# Allegro board GALVO_IF.brd
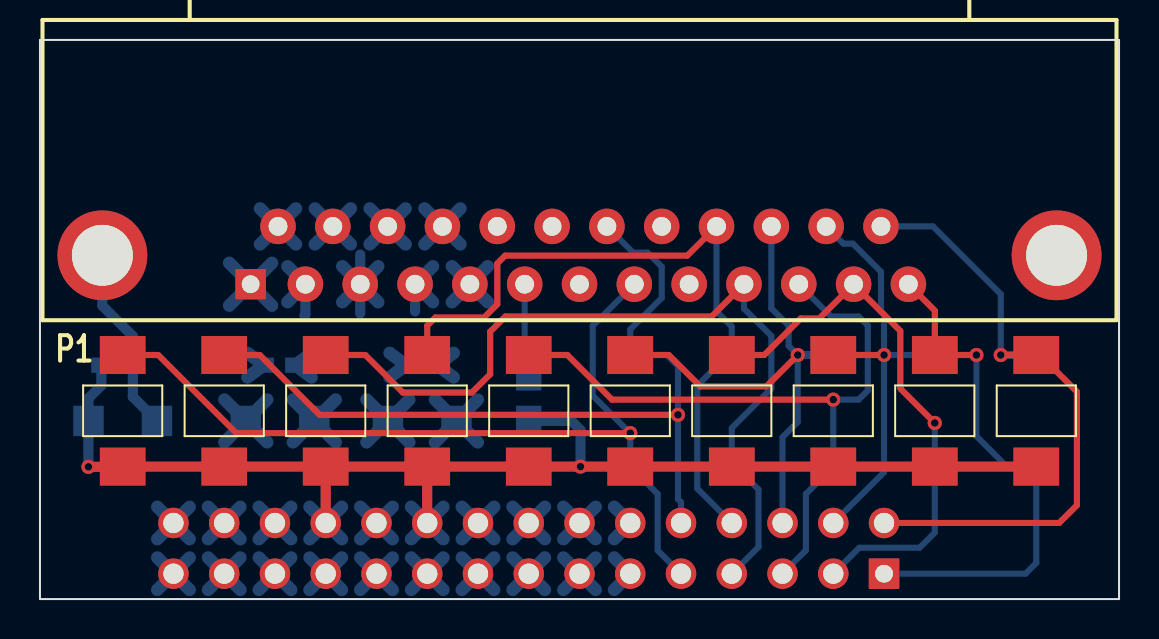
[diagram p0: board, top side]
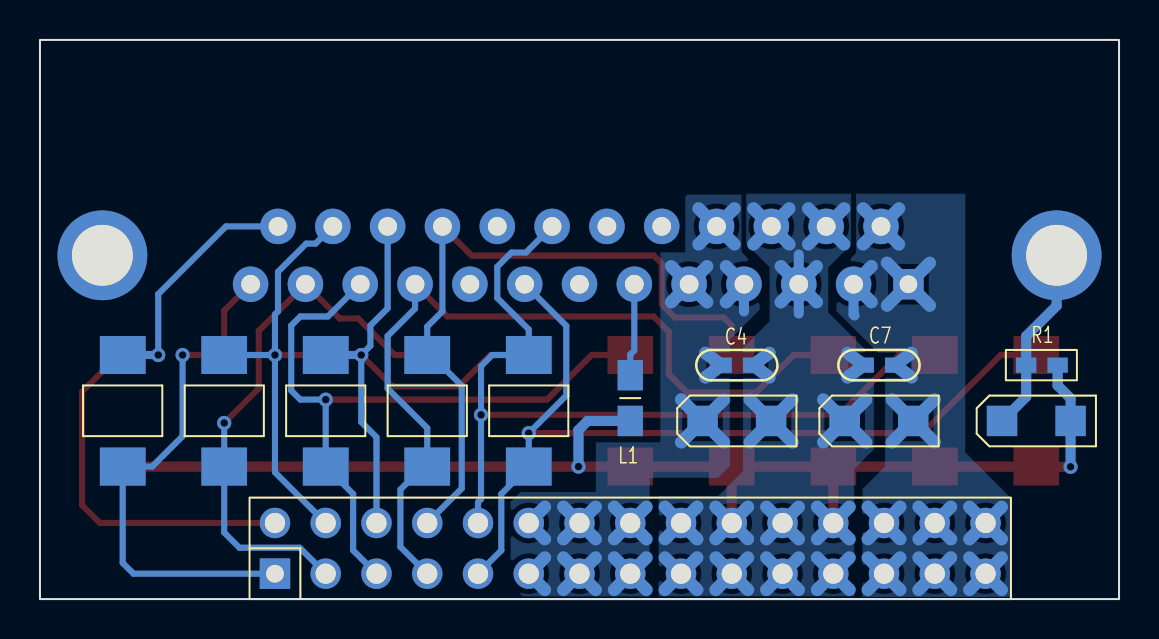
[diagram p1: board, bottom side, seen from below]

Outline 54 x 28 mm; copper layers: TOP, BOTTOM. Coordinates in mm from the lower left corner of the outline.
Outline path: rectangle 0,0 54,28

## Placement (name value [footprint] x y rotation side)
C1  102/2KV  [1206]  4.14 8.92 180 bottom
C3  22uF  [1206]  19.13 8.92 180 bottom
C4  0.1uF  [0603C]  19.89 11.71 180 bottom
C6  22uF  [1206]  12.01 8.92 180 bottom
C7  0.1uF  [0603C]  12.78 11.71 180 bottom
D1  SMBJ12CA  [DO-214AA]  49.86 9.43 90 bottom
D2  SMBJ12CA  [DO-214AA]  44.78 9.43 90 bottom
D3  SMBJ6.0CA  [DO-214AA]  44.78 9.43 270 top
D4  SMBJ6.0CA  [DO-214AA]  34.62 9.43 270 top
D5  SMBJ6.0CA  [DO-214AA]  49.86 9.43 270 top
D6  SMBJ6.0CA  [DO-214AA]  39.7 9.43 270 top
D7  SMBJ12CA  [DO-214AA]  39.7 9.43 90 bottom
D8  SMBJ12CA  [DO-214AA]  34.62 9.43 90 bottom
D9  SMBJ6.0CA  [DO-214AA]  24.46 9.43 270 top
D10  SMBJ6.0CA  [DO-214AA]  14.3 9.43 270 top
D11  SMBJ6.0CA  [DO-214AA]  29.54 9.43 270 top
D12  SMBJ6.0CA  [DO-214AA]  19.38 9.43 270 top
D13  SMBJ12CA  [DO-214AA]  29.54 9.43 90 bottom
D14  SMBJ6.0CA  [DO-214AA]  4.14 9.43 270 top
D15  SMBJ6.0CA  [DO-214AA]  9.22 9.43 270 top
J1  HEADER 15X2  [IDC30]  18.11 2.54 90 bottom
L1  null  [0805]  24.46 11.21 270 bottom
P1  CONNECTOR DB25  [DB25HF]  27 29 180 top
R1  1M  [0603R]  4.65 11.71 180 bottom

## Library data of the parts
C1 C3 C4 C6 C7 = C
D1-D15 = SMBJ6.0CA
J1 = HEADER 15X2
L1 = INDUCTOR
P1 = CONNECTOR DB25_0
R1 = R

## Footprints (pads in the part's own frame, mm; a bottom-side part is the same pattern mirrored in y, then rotated)
0603C
  rect 1.016x0.762 smd: 1(0,0) 2(1.575,0)
0603R
  rect 1.016x0.762 smd: 1(0,0) 2(1.575,0)
0805
  rect 1.524x1.27 smd: 1(0,0) 2(2.286,0)
1206
  rect 1.524x1.524 smd: 1(-1.714,0) 2(1.714,0)
DB25HF
  rect 1.524x1.524 hole 0.889: 1(16.459,13.233)
  round 1.778 hole 0.94: 2(13.716,13.233) 3(10.973,13.233) 4(8.23,13.233) 5(5.486,13.233) 6(2.743,13.233) 7(0,13.233) 8(-2.743,13.233) 9(-5.486,13.233) 10(-8.23,13.233) 11(-10.973,13.233) 12(-13.716,13.233) 13(-16.459,13.233) 14(15.088,10.338) 15(12.344,10.338) 16(9.601,10.338) 17(6.858,10.338) 18(4.115,10.338) 19(1.372,10.338) 20(-1.372,10.338) 21(-4.115,10.338) 22(-6.858,10.338) 23(-9.601,10.338) 24(-12.344,10.338) 25(-15.088,10.338)
  round 4.496 hole 3.048: 26(-23.876,11.786) 27(23.876,11.786)
DO-214AA
  rect 1.905x2.286 smd: 1(-2.794,0) 2(2.794,0)
IDC30
  rect 1.524x1.524 hole 0.889: 1(-1.27,24.13)
  round 1.524 hole 1.016: 2(1.27,24.13) 3(-1.27,21.59) 4(1.27,21.59) 5(-1.27,19.05) 6(1.27,19.05) 7(-1.27,16.51) 8(1.27,16.51) 9(-1.27,13.97) 10(1.27,13.97) 11(-1.27,11.43) 12(1.27,11.43) 13(-1.27,8.89) 14(1.27,8.89) 15(-1.27,6.35) 16(1.27,6.35) 17(-1.27,3.81) 18(1.27,3.81) 19(-1.27,1.27) 20(1.27,1.27) 21(-1.27,-1.27) 22(1.27,-1.27) 23(-1.27,-3.81) 24(1.27,-3.81) 25(-1.27,-6.35) 26(1.27,-6.35) 27(-1.27,-8.89) 28(1.27,-8.89) 29(-1.27,-11.43) 30(1.27,-11.43)

## Nets
GND: C1.2 C3.2 C4.2 C6.1 C7.1 D3.2 D4.2 D5.2 D6.2 D9.2 D10.2 D11.2 D12.2 D14.2 D15.2 J1.17 J1.18 J1.19 J1.20 J1.21 J1.22 J1.23 J1.24 L1.2 P1.3 P1.15 P1.16 R1.2
VDDNP: C6.2 C7.2 J1.25 J1.26 J1.27 J1.28 J1.29 J1.30 P1.1 P1.2 P1.14
VDDP: C3.1 C4.1 J1.11 J1.12 J1.13 J1.14 J1.15 J1.16 P1.4 P1.5 P1.17
XY_CLK+: D1.2 D5.1 J1.2 P1.25
XY_CLK-: D1.1 D3.1 J1.1 P1.13
XY_STATUS+: D13.2 D15.1 J1.10 P1.20
XY_STATUS-: D13.1 D14.1 J1.9 P1.8
XY_SYNC+: D2.2 D6.1 J1.4 P1.24
XY_SYNC-: D2.1 D4.1 J1.3 P1.12
XY_X+: D7.2 D11.1 J1.6 P1.23
XY_X-: D7.1 D9.1 J1.5 P1.11
XY_Y+: D8.2 D12.1 J1.8 P1.22
XY_Y-: D8.1 D10.1 J1.7 P1.10
N183598: C1.1 P1.27 R1.1
N191009: L1.1 P1.6

Pads without a net: P1 7 9 18 19 21 26

## Via types
v1: diameter 0.711, hole 0.381, TOP to BOTTOM, 10 vias

## Routing (per net, layer and track width the routed paths; a pad name or vN(x,y) marks a point on that pad's centre or on a via; arc(x,y) is an arc through that point)
GND: length 133.8
  TOP w0.508: v1(2.43,6.62) 4.13,6.62 D14.2 D15.2 D10.2 ; D12.2 D10.2 ; D12.2 D9.2 v1(27.05,6.63) D11.2 D4.2 D6.2 D3.2 D5.2 ; D12.2 J1.20 ; D10.2 J1.24
  BOTTOM w0.508: 16.03,14.3 P1.3 16.03,17.25 ; L1.2 26.59,8.92 27.05,8.46 v1(27.05,6.63) ; v1(2.43,6.62) C1.2 2.43,10.05 3.07,10.7 R1.2
  BOTTOM w0.635: 18.57,0.46 J1.19 ; J1.19 20.19,0.46 ; J1.19 20.19,2.08 ; J1.19 18.57,2.08 ; P1.16 18.29,17.77 ; P1.16 16.5,19.56 ; P1.16 18.29,19.56 ; P1.16 16.5,17.77 ; C3.2 18.48,7.85 ; C3.2 18.48,9.99 ; C3.2 16.34,7.85 ; C3.2 16.34,9.99 ; 21.11,0.46 J1.17 ; J1.17 22.73,2.08 ; J1.17 21.11,2.08 ; J1.17 22.73,0.46 ; J1.22 17.65,4.62 ; J1.22 16.03,3 ; J1.22 16.03,4.62 ; J1.22 17.65,3 ; J1.23 15.11,0.46 ; J1.23 13.49,2.08 ; J1.23 13.49,0.46 ; J1.23 15.11,2.08 ; 17.5,11.1 C4.2 17.5,12.32 ; 12.66,9.99 C6.1 ; C6.1 14.8,9.99 ; C6.1 14.8,7.85 ; C6.1 12.66,7.85 ; J1.21 17.65,0.46 ; J1.21 16.03,2.08 ; J1.21 17.65,2.08 ; J1.21 16.03,0.46 ; P1.3 16.92,14.87 ; P1.3 16.92,16.66 ; P1.3 15.13,16.66 ; P1.3 15.13,14.87 ; 13.59,12.32 C7.1 13.59,11.1 ; J1.24 15.11,3 ; J1.24 15.11,4.62 ; J1.24 13.49,3 ; J1.24 13.49,4.62 ; J1.20 20.19,4.62 ; J1.20 18.57,3 ; J1.20 20.19,3 ; J1.20 18.57,4.62 ; J1.18 22.73,3 ; J1.18 21.11,3 ; J1.18 21.11,4.62 ; J1.18 22.73,4.62 ; P1.15 15.55,17.77 ; P1.15 13.76,17.77 ; P1.15 15.55,19.56 ; P1.15 13.76,19.56
VDDNP: length 50.6
  BOTTOM w0.508: 13.23,14.2 13.28,14.25 P1.2
  BOTTOM w0.635: 10.95,2.08 J1.25 ; J1.25 12.57,0.46 ; J1.25 12.57,2.08 ; J1.25 10.95,0.46 ; 5.87,0.46 J1.29 ; J1.29 5.87,2.08 ; J1.29 7.49,0.46 ; J1.29 7.49,2.08 ; J1.28 10.03,4.62 ; J1.28 8.41,3 ; J1.28 8.41,4.62 ; J1.28 10.03,3 ; 9.23,7.85 C6.2 ; C6.2 11.37,9.99 ; C6.2 11.37,7.85 ; C6.2 9.23,9.99 ; 11.02,19.56 P1.14 ; P1.14 11.02,17.77 ; P1.14 12.81,17.77 ; P1.14 12.81,19.56 ; 10.39,11.1 C7.2 10.39,12.32 ; J1.30 7.49,3 ; J1.30 7.49,4.62 ; J1.30 5.87,3 ; J1.30 5.87,4.62 ; J1.27 10.03,2.08 ; J1.27 8.41,2.08 ; J1.27 10.03,0.46 ; J1.27 8.41,0.46 ; P1.1 11.61,16.83 ; P1.1 9.47,14.7 ; P1.1 11.61,14.7 ; P1.1 9.47,16.83 ; 10.95,4.62 J1.26 ; J1.26 10.95,3 ; J1.26 12.57,3 ; J1.26 12.57,4.62 ; 12.39,16.66 P1.2 12.39,14.87
VDDP: length 44.9
  BOTTOM w0.508: P1.4 18.77,14.41
  BOTTOM w0.635: 23.65,3 J1.16 ; J1.16 25.27,4.62 ; J1.16 25.27,3 ; J1.16 23.65,4.62 ; 26.19,2.08 J1.13 ; J1.13 26.19,0.46 ; J1.13 27.81,0.46 ; J1.13 27.81,2.08 ; 19.25,17.77 P1.17 ; P1.17 21.04,17.77 ; P1.17 21.04,19.56 ; P1.17 19.25,19.56 ; J1.15 25.27,2.08 ; J1.15 23.65,0.46 ; J1.15 25.27,0.46 ; J1.15 23.65,2.08 ; 20.62,14.87 P1.5 ; P1.5 20.62,16.66 ; P1.5 22.41,14.87 ; P1.5 22.41,16.66 ; 20.7,11.1 C4.1 20.7,12.32 ; 19.77,9.99 C3.1 ; C3.1 19.77,7.85 ; C3.1 21.91,7.85 ; C3.1 21.91,9.99 ; 28.73,3 J1.12 28.73,4.62 ; 26.19,3 J1.14 ; J1.14 27.81,3 ; J1.14 27.81,4.62 ; J1.14 26.19,4.62 ; 19.67,16.66 P1.4 19.67,14.87 ; 28.73,0.46 J1.11 28.73,2.08
XY_CLK+: length 32.5
  TOP w0.305: J1.2 51,3.81 51.89,4.7 51.89,10.38 50.05,12.22 D5.1 v1(48.08,12.22)
  BOTTOM w0.305: v1(48.08,12.22) 48.08,15.27 44.69,18.66 P1.25
  BOTTOM w0.406: D5.1 v1(48.08,12.22)
XY_CLK-: length 26.5
  TOP w0.305: P1.13 44.78,14.45 D3.1 v1(46.86,12.22)
  BOTTOM w0.305: J1.1 49.32,1.27 49.86,1.81 D1.1 48.39,6.63 46.86,8.16 v1(46.86,12.22)
XY_STATUS+: length 43.1
  TOP w0.305: v1(31.93,9.22) 14,9.22 13.69,9.53 11,12.22 D15.1
  BOTTOM w0.305: J1.10 32.08,4.85 31.93,5 v1(31.93,9.22) 31.93,11.66 31.37,12.22 D13.2 29.54,13.5 31.11,15.08 31.11,16.64 30.4,17.35 29.68,17.35 P1.20
XY_STATUS-: length 44.2
  TOP w0.305: D14.1 5.92,12.22 9.83,8.31 v1(29.54,8.31)
  BOTTOM w0.305: J1.9 30.91,2.44 30.91,5.26 D13.1 v1(29.54,8.31) 27.66,10.19 27.66,13.68 P1.8
XY_SYNC+: length 22.5
  TOP w0.305: v1(42.24,12.22) D6.1
  BOTTOM w0.305: P1.24 40.21,17.8 40.68,17.8 42.09,16.39 42.09,14.41 42.24,14.25 v1(42.24,12.22) ; D2.2 v1(42.24,12.22) ; v1(42.24,12.22) 42.24,6.35 J1.4
XY_SYNC-: length 27.6
  TOP w0.305: D4.1 36.25,12.22 38.07,14.05 39,14.05 P1.12 43.05,13.43 43.05,10.57 43.08,10.55 43.08,10.52 v1(44.78,8.82)
  BOTTOM w0.305: J1.3 41,2.57 44.02,2.57 44.78,3.33 D2.1 v1(44.78,8.82)
XY_X+: length 27.2
  TOP w0.305: D11.1 31.47,12.22 33.05,10.65 36.35,10.65 v1(37.92,12.22)
  BOTTOM w0.305: J1.6 37.16,8.11 37.92,8.87 v1(37.92,12.22) 37.46,12.68 37.46,13.7 36.6,14.56 P1.23
  BOTTOM w0.406: D7.2 v1(37.92,12.22)
XY_X-: length 35.4
  TOP w0.305: D9.1 26.39,12.22 28.63,9.99 v1(39.7,9.99)
  BOTTOM w0.305: P1.11 39.59,14.15 40.97,14.15 41.43,13.7 41.43,10.44 40.97,9.99 v1(39.7,9.99) D7.1 38.33,5.26 38.33,2.44 J1.5
XY_Y+: length 35.9
  TOP w0.305: P1.22 32.4,17.2 23.28,17.2 22.89,16.81 22.89,14.76 22.22,14.1 19.79,14.1 19.38,13.7 D12.1
  BOTTOM w0.305: J1.8 32.89,5.54 32.89,10.69 34.43,12.22 D8.2 34.62,13.64 33.86,14.41 P1.22
XY_Y-: length 42.3
  TOP w0.305: P1.10 33.62,14.15 23.29,14.15 22.53,13.39 22.53,11.26 21.62,10.34 18.16,10.34 16.28,12.22 D10.1
  BOTTOM w0.305: P1.10 35.23,14.55 36.6,13.18 36.6,10.55 34.62,8.56 D8.1 34.81,6.63 35.96,5.48 35.96,2.61 J1.7
N183598: length 9.4
  BOTTOM w0.508: C1.1 4.65,10.13 R1.1 4.65,13.16 3.12,14.69 P1.27
N191009: length 4.6
  BOTTOM w0.305: L1.1 24.46,12.25 24.26,12.45 P1.6

## Copper pours and planes (outline as drawn; the poured copper is in the pictures)
GND on BOTTOM: 13.26,6.51 13.26,0.14 23.04,0.14 23.04,5.16 20.05,5.16 18.82,6.39 18.82,12.58 17.48,13.92 17.48,16.62 18.66,17.79 18.66,20.3 13.41,20.3 13.41,17.75 14.55,16.61 14.55,14.35 12.27,12.07 12.27,7.5
VDDNP on BOTTOM: 12.84,0.1 5.38,0.1 5.38,5.02 7.7,7.35 7.7,20.3 13.16,20.3 13.16,17.32 14.14,16.34 14.14,14.42 11.71,11.99 11.71,6.63 12.84,5.5
VDDP on BOTTOM: 30.45,0.74 30.45,4.87 29.95,5.36 26.18,5.36 26.18,7.85 22.95,7.85 22.95,17.32 22.91,17.36 21.7,17.36 21.7,20.16 21.61,20.25 18.89,20.25 18.89,17.37 17.98,16.46 17.98,14.49 19.48,12.99 19.48,6.65 20.06,6.08 23.49,6.08 23.49,0.13 29.85,0.13
